# Altium PCB PCB2 4 warstwy.PcbDoc
Units mil, origin at the board's own origin, x right, y up, seen from the top; angles counter-clockwise.
Board outline 6000 x 4000 mil, 4 copper layers (Top Layer, +5VDC, GND, Bottom Layer), stack 23.756 mil thick; 111 components, 87 nets, 302 pads, 10 vias.
Unrouted connection lines stored in the file: 202.
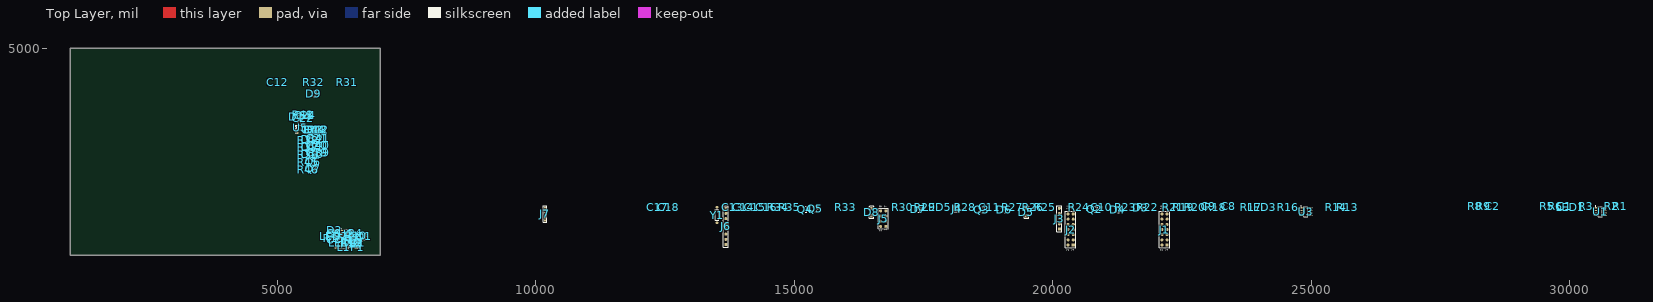
[diagram p0: Top Layer view]
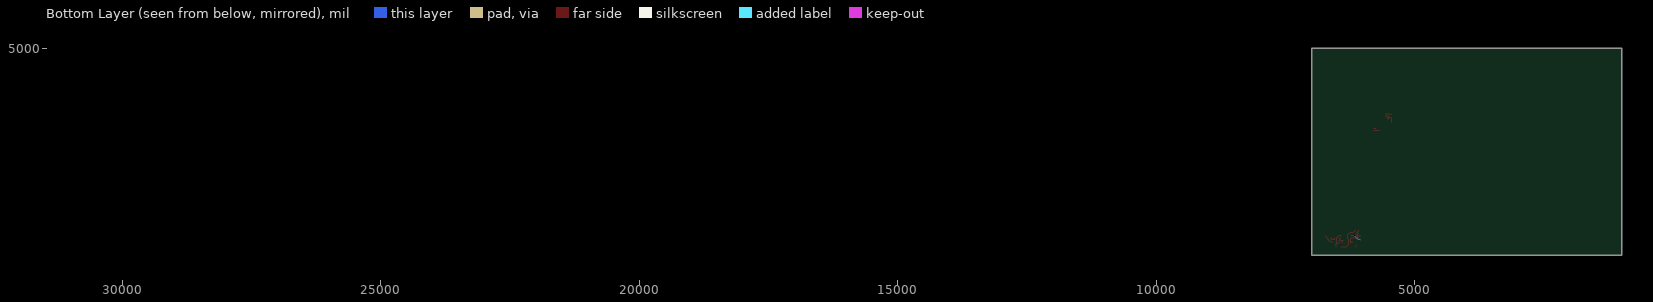
[diagram p1: Bottom Layer view, seen from below]
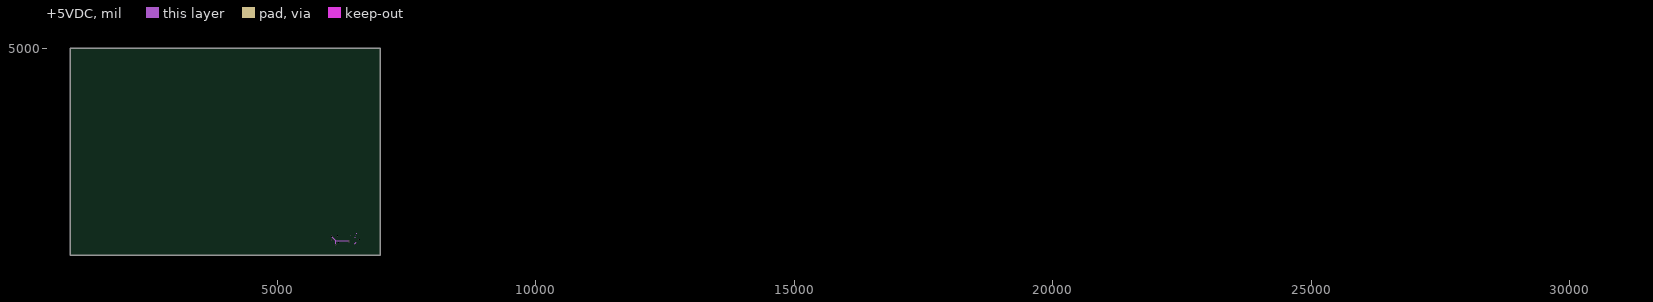
[diagram p2: +5VDC]
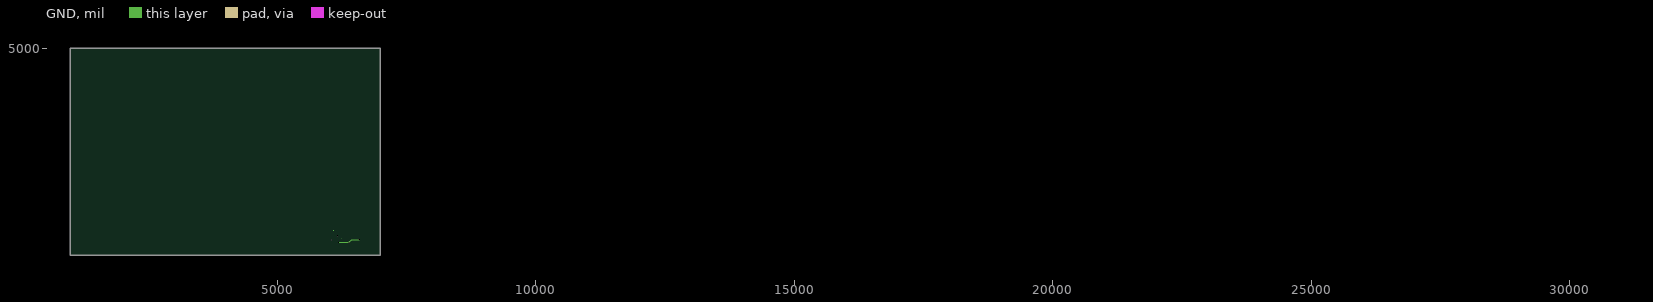
[diagram p3: GND]

## Layer stack, top to bottom
Top Solder: solder mask 0.4, Solder Resist, Dk 3.5
Top Layer: signal copper 1.4
Dielectric 2: prepreg 2.8, PP-006, Dk 4.1
+5VDC: signal copper 1.3779
Dielectric 1: dielectric 12.6, FR-4, Dk 4.8
GND: signal copper 1.3779
Dielectric 3: prepreg 2.8, PP-006, Dk 4.1
Bottom Layer: signal copper 1.4
Bottom Solder: solder mask 0.4, Solder Resist, Dk 3.5

## Board outline
1000,1000 7000,1000 7000,5000 1000,5000

## Design rules (kind name [scope] priority, off if disabled: settings)
Clearance [All] p1: gap=6 ignorepadtopadclearanceinfootprint=FALSE
PolygonConnect [All] p1: connectstyle=Relief reliefconductorwidth=10 reliefentries=4 polygonreliefangle="90 Angle" airgapwidth=10
RoutingVias [All] p1: holewidth=16 width=20 viastyle="Through Hole" minholewidth=8 minwidth=18 maxholewidth=39 maxwidth=50
SolderMaskExpansion [All] p1: expansion=4
Width [All] p1: maxlimit=10 minlimit=10 preferedwidth=10
30 further rules are at their usual default settings.

## Components (designator, comment, footprint, x,y, rotation, side; value= is the part's Value field where it differs from the comment)
C1 "100n" 0603 29905,1945 r0 top
C2 "4n7" 0603 28515,1945 r0 top value=100n
C3 "100n" 0402-A 6535,1300 r0 top
C4 "10u/16" 0402-A 6535,1340 r0 top value=470u/16
C5 "100u/6V3" 0603 6105,1395 r0 top value=470u/16
C6 "100n" 0603 6105,1425 r0 top
C7 "100p" 0603 6105,1295 r180 top value=100pF
C8 "100n" 0603 23410,1945 r0 top
C9 "4n7" 0603 23020,1945 r0 top value=100n
C10 "100n" 0603 20955,1930 r90 top
C11 "100n" 0603 18785,1930 r90 top
C12 "100n" 0603 5010,4340 r90 top
C13 "100n" 0603 13810,1930 r90 top
C14 "100n" 0603 14030,1930 r90 top
C15 "100n" 0603 14250,1930 r90 top
C16 "100n" 0603 14470,1930 r90 top
C17 "27p" 0603 12360,1930 r90 top value=100n
C18 "27p" 0603 12580,1930 r90 top value=100n
C19 "100n" 0402 5780,2975 r270 top
C20 "100n" 0402 5780,3120 r270 top
C21 "100n" 0402 5780,3265 r270 top
C22 "100n" 0603 5505,3645 r270 top
C23 "100n" 0402 5690,3425 r270 top
C24 "10n" 0402 5540,3705 r90 top value=100pF
D1 "P6SMB15A" 6-0805_N 6560,1240 r180 top
D2 "LL5817" 6-0805_L 6120,1480 r0 top
D3 "LL4148" 6-0805_N 21710,1920 r0 top
D4 "BAT54S" SOT23_M 21260,1875 r0 top
D5 "LL4148" 3.2X1.6X1.1 19495,1830 r90 top
D6 "BAT54S" SOT-23B_M 19070,1875 r0 top
D7 "BAT54S" SOT23_N 17400,1885 r0 top
D8 "LL4148" 3.2X1.6X1.1 16500,1830 r90 top
D9 "BAT54S" SOT23_M 5710,4120 r0 top
D10 "BAT54S" SOT23_L 5692.68,2955 r0 top
D11 "BAT54S" SOT23_L 5690,3100 r0 top
D12 "BAT54S" SOT23_L 5690,3245 r0 top
D13 "LL4148" 0402 5760,3425 r90 top
D14 "LL4448" 6-0805_N 5450,3680 r270 top
F1 "Fuse 1" 6-0805_N 6560,1150 r180 top
J1 "Header 7X2" HDR2X7 22215,1195 r90 top
J2 "Header 7X2" HDR2X7 20400,1195 r90 top
J3 "ZL201" HDR1X5 20130,1505 r90 top
J4 "MX-43045-0400" MHDR2X2 18120,1870 r0 top
J5 "MX-43045-0800" HDR2X4 16775,1555 r90 top
J6 "MX-43045-0600" HDR1X8 13680,1205 r90 top
J7 "MX-43045-0600" MHDR1X6 10180,1670 r90 top
L1 "DL22-330" AXIAL-0.3 6285,1150 r180 top value=100uH
LED1 "HCL-1904AYL" 0603 30025,1930 r90 top
LED2 "HCL-1903BG4" 0603 6105,1365 r0 top
LED3 "HCL-1906BR1" 0603 24060,1930 r90 top
LED4 "HCL-1904AYL" 6-0805_N 6275,1240 r180 top
LED5 "HCL-1906BR1" 0603 17770,1930 r90 top
Q1 "BSS138" SOT23_N 6690,1360 r0 top
Q2 "BSS123" SOT23_N 20815,1885 r0 top
Q3 "BSS123" SOT23_M 18630,1875 r0 top
Q4 "BSS123" SOT23_N 15220,1885 r0 top
Q5 "BSS123" SOT23_L 15410,1895 r0 top
Q6 "BSS123" SOT23_L 5695,2810 r0 top
Q7 "BSS123" SOT23_L 5695,2670 r0 top
R1 "CAN0001" 0603 30985,1945 r0 top
R2 "CAN0001" 0603 30815,1945 r0 top
R3 "nc" 0603 30325,1945 r0 top value=1K
R4 "1R" 0603 6525,1425 r0 top value=1K
R5 "4k7" 0603 29565,1945 r0 top value=1K
R6 "1k" 0603 29735,1945 r0 top value=1K
R7 "3k6 1%" 0603 6445,1275 r0 top value=1K
R8 "68" 0603 28175,1945 r0 top value=1K
R9 "68" 0603 28345,1945 r0 top value=1K
R10 "1M" 0603 6530,1375 r0 top value=1K
R11 "1k2 1%" 0603 6445,1245 r0 top value=1K
R12 "4k7" 0603 6445,1215 r180 top value=1K
R13 "CAN0001" 0603 25710,1930 r90 top
R14 "CAN0001" 0603 25490,1930 r90 top
R15 "1k8" 0603 6103.78,1325 r0 top value=1K
R16 "nc" 0603 24560,1930 r90 top value=1K
R17 "4k7" 0603 23840,1930 r90 top value=1K
R18 "1k" 0603 23160,1930 r90 top value=1K
R19 "68" 0603 22540,1930 r90 top value=1K
R20 "68" 0603 22760,1930 r90 top value=1K
R21 "10k" 0603 22330,1930 r90 top value=1K
R22 "10k" 0603 21840,1930 r90 top value=1K
R23 "1k" 0603 21420,1930 r90 top value=1K
R24 "4k7" 0603 20520,1930 r90 top value=1K
R25 "10k" 0603 19860,1930 r90 top value=1K
R26 "10k" 0603 19630,1930 r90 top value=1K
R27 "1k" 0603 19230,1930 r90 top value=1K
R28 "4k7" 0603 18315,1930 r90 top value=1K
R29 "10k" 0603 17540,1930 r90 top value=1K
R30 "1k8" 0603 17100,1930 r90 top value=1K
R31 "10k" 0603 6360,4340 r90 top value=1K
R32 "1k" 0603 5705,4340 r90 top value=1K
R33 "nc" 0603 16000,1930 r90 top value=1K
R34 "4k7" 0603 14690,1930 r90 top value=1K
R35 "4k7" 0603 14920,1930 r90 top value=1K
R36 "10k" 0402 5605,2940 r90 top value=1K
R37 "10k" 0402 5600,3085 r90 top value=1K
R38 "10k" 0402 5605,3225 r90 top value=1K
R39 "470" 0402 5820,2975 r90 top value=1K
R40 "1k" 0402 5820,3120 r90 top value=1K
R41 "1k" 0402 5820,3265 r90 top value=1K
R42 "4k7" 0402 5795,3425 r270 top value=1K
R43 "10k" 0603 5505,3713.78 r270 top value=1K
R44 "4k7" 0402 5725,3425 r270 top value=1K
R45 "4k7" 0402 5605,2795 r270 top value=1K
R46 "4k7" 0402 5605,2655 r270 top value=1K
S1 "DTSM32NB" 0402 5575,3705 r90 top
U1 "MCP2551-I/SN" SO8_L 30590,1840 r0 top
U2 "MC33063AD" SO8_N 6335,1400 r0 top
U3 "MCP2551-I/SN" SO8_L 24900,1840 r0 top
U5 "MCP1320-46LT" SOP5(6) 5450,3465 r0 top
Y1 "10MHz" AXIAL-0.3 13510,1775 r90 top

## Footprints (in the part's own frame and the unit in brackets; to place one, negate y for a bottom-side part, rotate by r counter-clockwise, add the part's x,y. Pads: shape width x height; smd on the part's side, far side on the other; paste and mask are expansions set on the pad)
3.2X1.6X1.1 [mm] "SMT LED; 2 Flat Leads"
  rect 1.5x1.5 smd: 1(-1.75,0) 2(1.75,0)
  silkscreen extent -2.9,-1.15 3.2,1.15
6-0805_L [mm] "Chip Resistor, Body 2.0x1.2mm, IPC High Density"
  rect 1x1.3 smd: 1(-0.8,0) 2(0.8,0)
  silkscreen extent 0,-0.55 0,0.55, body extent -1.07,-0.7 1.07,0.7, height 0.7
6-0805_N [mm] "Chip Resistor, Body 2.0x1.2mm, IPC Medium Density"
  rect 1.2x1.4 smd: 1(-0.9,0) 2(0.9,0)
  silkscreen extent 0,-0.6 0,0.6, body extent -1.07,-0.7 1.07,0.7, height 0.7
0402 [mm] "Chip Capacitor, Body 1.0x0.5mm, IPC High Density"
  rect 0.6x0.5 smd: 1(-0.5,0) 2(0.5,0)
  body extent -0.55,-0.3 0.55,0.3, height 1.3
0402-A [mm] "Chip Inductor, Body 1.0x0.5mm, IPC High Density"
  rect 0.6x0.5 smd: 1(-0.5,0) 2(0.5,0)
  silkscreen extent -1.1,-0.15 -1.1,0.15, body extent -0.55,-0.3 0.55,0.3, height 0.55
0603 [mm] "Chip Inductor, Body 0.6x0.3mm, IPC High Density"
  rect 0.5x0.3 smd: 1(-0.35,0) 2(0.35,0)
  silkscreen extent -0.9,-0.05 -0.9,0.05, body extent -0.33,-0.18 0.33,0.18, height 0.55
AXIAL-0.3 [mm] "Axial Device, Thru-Hole; 2 Leads; 0.3 in Pin Spacing"
  round 1.4 smd: 1(-3.81,0) 2(3.81,0)
  silkscreen extent -2.77,-0.76 2.77,0.76
HDR1X5 [mm] "Connector; Header; 5 Position"
  rect 1.5x1.5 smd: 1(0,0)
  round 1.5 smd: 2(2.54,0) 3(5.08,0) 4(7.62,0) 5(10.16,0)
  silkscreen extent -1.27,-1.27 11.43,1.27
HDR1X8 [mm] "Connector; Header; 8 Position"
  rect 1.5x1.5 smd: 1(0,0)
  round 1.5 smd: 2(2.54,0) 3(5.08,0) 4(7.62,0) 5(10.16,0) 6(12.7,0) 7(15.24,0) 8(17.78,0)
  silkscreen extent -1.27,-1.27 19.05,1.27
HDR2X4 [mm] "Connector; Header; 4x2 Position"
  rect 1.5x1.5 smd: 1(0,0)
  round 1.5 smd: 2(0,2.54) 3(2.54,0) 4(2.54,2.54) 5(5.08,0) 6(5.08,2.54) 7(7.62,0) 8(7.62,2.54)
  silkscreen extent -1.27,-1.27 8.89,3.81
HDR2X7 [mm] "Connector; Header; 7x2 Position"
  rect 1.5x1.5 smd: 1(0,0)
  round 1.5 smd: 2(0,2.54) 3(2.54,0) 4(2.54,2.54) 5(5.08,0) 6(5.08,2.54) 7(7.62,0) 8(7.62,2.54) 9(10.16,0) 10(10.16,2.54) 11(12.7,0) 12(12.7,2.54) 13(15.24,0) 14(15.24,2.54)
  silkscreen extent -1.27,-1.27 16.51,3.81
MHDR1X6 [mm] "Connector; Header; 6 Position"
  rect 1x1 smd: 1(0,0)
  round 1 smd: 2(1.27,0) 3(2.54,0) 4(3.81,0) 5(5.08,0) 6(6.35,0)
  silkscreen extent -0.9,-0.9 7.25,0.9
MHDR2X2 [mm] "Connector; Header; 2x2 Position"
  rect 1x1 smd: 1(0,0)
  round 1 smd: 2(0,1.27) 3(1.27,0) 4(1.27,1.27)
  silkscreen extent -0.9,-0.9 2.17,2.17
SO8_L [mm] "SOIC, 8-Leads, Body 4.9x3.9mm, Pitch 1.27mm, IPC High Density"
  oval 1.9x0.6 smd: 1(-2.35,1.905) 2(-2.35,0.635) 3(-2.35,-0.635) 4(-2.35,-1.905) 5(2.35,-1.905) 6(2.35,-0.635) 7(2.35,0.635) 8(2.35,1.905)
  silkscreen extent -2.47,-2.5 1,2.88, body extent -2,-2.5 2,2.5, height 1.75
SO8_N [mm] "SOIC, 8-Leads, Body 4.9x3.9mm, Pitch 1.27mm, IPC Medium Density"
  oval 2.2x0.6 smd: 1(-2.4,1.905) 2(-2.4,0.635) 3(-2.4,-0.635) 4(-2.4,-1.905) 5(2.4,-1.905) 6(2.4,-0.635) 7(2.4,0.635) 8(2.4,1.905)
  silkscreen extent -2.52,-2.5 0.9,2.88, body extent -2,-2.5 2,2.5, height 1.75
SOP5(6) [mm] "Small Outline; 6 Leads (1 Absent); Body Width 4.4 mm; Pitch 1.27 mm"
  rect 0.6x1.2 smd: 1(-1.27,-2.6) 3(1.27,-2.6) 4(1.27,2.6) 5(0,2.6) 6(-1.27,2.6)
  silkscreen extent -2.24,-2.72 2.15,1.1
SOT23_L [mm] "SOT23, 3-Leads, Body 2.9x1.3mm, Pitch 0.95mm, Lead Span 2.3mm - Reverse Pinning, IPC High Density"
  rect 0.85x0.6 smd: 1(1.075,0) 2(-1.075,-0.95) 3(-1.075,0.95)
  silkscreen extent -0.3,-1.5 1.48,1.5, body extent -0.7,-1.5 0.7,1.5, height 1.1
SOT23_M [mm] "SOT23, 3-Leads, Body 2.9x1.3mm, Pitch 0.95mm, Lead Span 2.3mm - Reverse Pinning, IPC Low Density"
  rect 1.45x0.6 smd: 1(1.175,0) 2(-1.175,-0.95) 3(-1.175,0.95)
  silkscreen extent -0.1,-1.5 1.48,1.5, body extent -0.7,-1.5 0.7,1.5, height 1.1
SOT23_N [mm] "SOT23, 3-Leads, Body 2.9x1.3mm, Pitch 0.95mm, Lead Span 2.3mm - Reverse Pinning, IPC Medium Density"
  rect 1.15x0.6 smd: 1(1.125,0) 2(-1.125,-0.95) 3(-1.125,0.95)
  silkscreen extent -0.2,-1.5 1.48,1.5, body extent -0.7,-1.5 0.7,1.5, height 1.1
SOT-23B_M [mm] "SOT23, 3-Leads, Body 2.9x1.3mm, Pitch 0.95mm, Lead Span 2.4mm, IPC Low Density"
  rect 1.45x0.6 smd: 1(-1.175,0.95) 2(-1.175,-0.95) 3(1.175,0)
  silkscreen extent -1.3,-1.5 0.7,1.92, body extent -0.7,-1.5 0.7,1.5, height 1.14

## Part data
C1 C2 C3 C6 C7 C8 C9 C10 C11 C12 C13 C14 C15 C16 C17 C18 C19 C20 C21 C22 C23 C24: library part Cap, "Capacitor", LatestRevisionDate=17-Jul-2002, LatestRevisionNote="Re-released for DXP Platform.", PackageReference=RAD-0.3, Published=8-Jun-2000, Publisher="Altium Limited"
C4 C5: library part "Cap Pol1", "Polarized Capacitor (Radial)", LatestRevisionDate=17-Jul-2002, LatestRevisionNote="Re-released for DXP Platform.", PackageReference=RB7.6-15, Published=8-Jun-2000, Publisher="Altium Limited"
D1: library part "D Zener", "Zener Diode", LatestRevisionDate=17-Jul-2002, LatestRevisionNote="Re-released for DXP Platform.", PackageReference=DIODE-0.7, Published=8-Jun-2000, Publisher="Altium Limited"
D2 D3 D5 D8 D13: library part 1N4148, "High Conductance Fast Diode", Code_JEDEC=DO-204-AH, ComponentLink1Description="Manufacturer Link", ComponentLink1URL=http://www.fairchildsemi.com/, ComponentLink2Description=Datasheet, ComponentLink2URL=http://www.fairchildsemi.com/ds/1N%2F1N4148.pdf, DatasheetDocument=1997, LatestRevisionDate=17-Jul-2002, LatestRevisionNote="Re-released for DXP Platform.", PackageReference=DO-35, Published=8-Jun-2000, Publisher="Altium Limited"
D4 D6 D7 D9 D10 D11 D12: "Schottky Barrier Double Diode", ComponentLink1Description="Manufacturer Link", ComponentLink1URL=http://www.semiconductors.philips.com/, ComponentLink2Description=Datasheet, ComponentLink2URL=http://www.semiconductors.philips.com/acrobat/datasheets/BAT54_SERIES_4.pdf, DatasheetVersion=4-Mar-2002, LatestRevisionDate=12-Dec-2006, LatestRevisionNote="IPC-7351 Footprint Added.", PackageDescription="3-Pin SOT-23 Package 0.95 mm Pitch, 2.3 mm Lead Span", PackageReference=SOT23, PackageVersion=May-1999, Published=17-Sep-2003, Publisher="Altium Limited"
D14: library part Diode, "Default Diode", PackageDocument=Sep-1996, Code_JEDEC=DO-214-AB, LatestRevisionDate=17-Jul-2002, LatestRevisionNote="Re-released for DXP Platform.", PackageReference=SMC, Published=8-Jun-2000, Publisher="Altium Limited"
F1: "Fuse", LatestRevisionDate=17-Jul-2002, LatestRevisionNote="Re-released for DXP Platform.", PackageReference=PIN-W2/E2.8, Published=8-Jun-2000, Publisher="Altium Limited"
J1 J2: "Header, 7-Pin, Dual row", LatestRevisionDate=17-Jul-2002, LatestRevisionNote="Re-released for DXP Platform.", Publisher="Altium Limited"
J3: library part CON5, "Connector"
J4: library part "Header 2X2", "Header, 2-Pin, Dual row", LatestRevisionDate=17-Jul-2002, LatestRevisionNote="Re-released for DXP Platform.", Publisher="Altium Limited"
J5: library part "Header 4X2A", "Header, 4-Pin, Dual row", LatestRevisionDate=17-Jul-2002, LatestRevisionNote="Re-released for DXP Platform.", Publisher="Altium Limited"
J6 J7: library part "Header 6", "Header, 6-Pin", LatestRevisionDate=17-Jul-2002, LatestRevisionNote="Re-released for DXP Platform.", Publisher="Altium Limited"
L1: library part "Inductor Iron", "Magnetic-Core Inductor", Published=24-Mar-1999, Publisher="Altium Limited", Revision="July-2002: Re-released for DXP Platform."
LED1 LED2 LED3 LED4 LED5: library part LED3, "Typical BLUE SiC LED", Published=8-Jun-2000, Publisher="Altium Limited", Revision 1="Jul-2002: Re-released for DXP Platform.", Revision 2="17-Dec-2003: PCB Footprint replaced."
Q1: "N-Channel Enhancement Mode Vertical DMOS FET", ComponentLink1Description="Manufacturer Link", ComponentLink1URL=http://www.zetex.com/, ComponentLink2Description=Datasheet, ComponentLink2URL=www.zetex.com/3.0/pdf/BSS138.pdf, DatasheetVersion=Mar-96, PackageDescription="SOT-23; 3 Leads; Body 3.1 x 2.5 mm, inc. leads (LxW max), Alternate Lead Configuration", PackageReference=SOT23, PackageVersion=1996, Published=17-Dec-2003, Publisher="Altium Limited"
Q2 Q3 Q4 Q5 Q6 Q7: "N-channel Enhancement Mode Vertical D-MOSFET", ComponentLink1Description="Manufacturer Link", ComponentLink1URL=http://www.semiconductors.philips.com/, ComponentLink2Description=Datasheet, ComponentLink2URL=http://www.semiconductors.philips.com/acrobat/datasheets/BSS123_3.pdf, DatasheetVersion=Apr-1995, LatestRevisionDate=12-Dec-2006, LatestRevisionNote="IPC-7351 Footprint Added.", PackageDescription="3-Pin SOT-23 Package 0.95 mm Pitch, 2.3 mm Lead Span", PackageReference=SOT23, PackageVersion=May-1999, Published=17-Sep-2003, Publisher="Altium Limited"
R1 R2 R13 R14: library part "Res Varistor", "Varistor (Voltage-Sensitive Resistor)", LatestRevisionDate=04-Mar-2005, LatestRevisionNote="PCB Footprint replaced.", PackageReference=6-0805, Published=24-Mar-1999, Publisher="Altium Limited"
R3 R4 R5 R6 R7 R8 R9 R10 R11 R12 R15 R16 R17 R18 R19 R20 R21 R22 R23 R24 R25 R26 R27 R28 R29 R30 R31 R32 R33 R34 R35 R36 R37 R38 R39 R40 R41 R42 R43 R44 R45 R46: library part Res2, "Resistor", LatestRevisionDate=17-Jul-2002, LatestRevisionNote="Re-released for DXP Platform.", PackageReference=AXIAL-0.4, Published=8-Jun-2000, Publisher="Altium Limited"
S1: library part PUSHB, "Switch PushButton"
U1 U3: "High Speed CAN Transceiver, 8-Pin Plastic SOIC, Industrial Grade", Code_JEDEC=MS-012, ComponentLink1Description="Manufacturer Link", ComponentLink1URL=http://www.microchip.com, ComponentLink2Description=Datasheet, ComponentLink2URL=http://ww1.microchip.com/downloads/en/DeviceDoc/21667d.pdf, DatasheetVersion=Nov-2003, LatestRevisionDate=13-Apr-2006, LatestRevisionNote="IPC-7351 Footprint Added.", PackageDescription="8-Pin Plastic Narrow Body Small Outline Integrated Circuit 1.27 mm Pitch", PackageReference=SOIC150-8, PackageVersion=Oct-2005, Published=6-Oct-2005, Publisher="Altium Limited"
U2: "DC-to-DC Converter Control Circuit", Code_IPC=SOIC127P600-8, Code_JEDEC=MS-012-AA, ComponentLink1Description="Manufacturer Link", ComponentLink1URL=http://www.onsemi.com/site/products/taxonomy/0,4438,503,00.html, ComponentLink2Description=Datasheet, ComponentLink2URL=http://www.onsemi.com/pub/Collateral/MC34063A-D.PDF, DatasheetVersion=1988, LatestRevisionDate=13-Apr-2006, LatestRevisionNote="IPC-7351 Footprint Added.", PackageDescription="8-Pin Small Outline Integrated Circuit 1.27 mm Pitch", PackageReference=751-02, Published=17-Jul-2002, Publisher="Altium Limited"
U5: library part MCP1320
Y1: library part XTAL, "Crystal Oscillator", LatestRevisionDate=17-Jul-2002, LatestRevisionNote="Re-released for DXP Platform.", PackageReference=R38, Published=8-Jun-2000, Publisher="Altium Limited"

## Via types
v1: diameter 20, hole 16, Top Layer to +5VDC, 5 vias
v2: diameter 20, hole 16, Top Layer to GND, 3 vias
v3: diameter 20, hole 16, +5VDC to Bottom Layer, 2 vias

## Nets (pads, with @x,y where several pads share a name; then routed paths per layer and width w, separated by ;. In a path a pad name is that pad's centre, name@x,y a point inside that pad or via, vN(x,y) a via of type N, cw(c..) or ccw(c..) an arc to the next point about the centre after c; other vN are vias at no path point)
+5V: C1.1 C5.1 C6.1 C8.1 C13.1 C14.1 C15.1 C16.1 C22.1 D4.2 D6.2 D7.2 D9.2 D10.2 D11.2 D12.2 D13.2 D14.2 J1.2 J2.2 J2.4 J2.6 J3.2 J4.2 L1.2 LED1.1 LED2.1 LED3.1 LED5.1 R7.1 R22.1 R26.1 R31.1 R36.1 R37.1 R38.1 R42.1 R43.2 U1.3 U3.3 U5.5 | length 864
  Top Layer w10: U5.5 D14.2 5464.21,3658.78 C22.1 R43.2 ; D13.2 R42.1 ; v1(6050,1365) LED2.1 C5.1 C6.1 ; L1.2 v1(6135,1200) ; v1(6390,1275) R7.1
  +5VDC w10: v1(6050,1365) 6135,1280 ; v1(6135,1200) 6135,1280 ; v1(6390,1275) 6140,1275 6135,1280
+12V: C3.1 C4.1 D1.2 F1.2 J5.5 R4.2 R10.1 R12.1 U2.6 | length 420.7
  Top Layer w10: U2.6 6460.98,1375 6491.14,1344.84 6510.47,1344.84 C4.1 C3.1 6515.31,1249.25 D1.2 D1.2@6524.57,1236.06 ; R12.1 6503.5,1215 D1.2@6524.57,1236.06 ; F1.2 D1.2@6524.57,1236.06
  +5VDC w10: 6503.5,1215 6524.57,1236.06 6524.57,1240 6515.31,1249.25 ; 6515.31,1340 6515.77,1340.45 ; 6515.31,1375 6515.77,1374.55 ; 6534.84,1425 6538.78,1425
+12VPWR: F1.1 J6.3 J7.3
ADC0: J1.4
ADC1: J1.6
ADC2: J1.8
ADC3: J1.10
ADC4: J1.12
ButD: C10.1 D4.3 R22.2 R23.2
ButD_IN: J5.2 R23.1
ButN: C11.1 D6.3 R26.2 R27.2
ButN_IN: J5.3 R27.1
ButR: C12.1 D9.3 R31.2 R32.2
ButR_IN: J5.4 R32.1
CAN_BMS_RX: 
CAN_BMS_TX: R17.2 U3.1
CAN_BMSS_H: J7.1 R13.2 R20.1 U3.7
CAN_BMSS_L: J7.2 R14.1 R19.1 U3.6
CAN_MUX_RX: 
CAN_MUX_TX: R5.2 U1.1
CAN_MUXED_H: J6.1 R1.2 R9.1 U1.7
CAN_MUXED_L: J6.2 R2.1 R8.1 U1.6
ChrgLED: Q6.3 R45.1
ChrgLED_OUT: J7.6 Q6.1
FluidHeater: Q7.3 R46.1
FluidHeater_OUT: J6.6 Q7.1
GND: C1.2 C2.1 C3.2 C4.2 C5.2 C6.2 C7.1 C8.2 C9.1 C10.2 C11.2 C12.2 C13.2 C14.2 C15.2 C16.2 C17.2 C18.2 C19.2 C20.2 C21.2 C22.2 C23.1 C24.1 D2.1 D4.1 D6.1 D7.1 D9.1 D10.1 D11.1 D12.1 J1.14 J2.12 J2.14 J3.3 J4.1 J5.1 LED4.2 Q1.2 Q2.2 Q3.2 Q4.2 Q5.2 Q6.2 Q7.2 R1.1 R2.2 R6.2 R11.1 R13.1 R14.2 R15.2 R18.2 R24.2 R28.2 R34.2 R35.2 R45.2 R46.2 S1.1 U1.2 U2.4 U3.2 | length 1184.2
  Top Layer w10: C22.2 5505,3635.16 5505.91,3636.06 5513.59,3636.06 5536.03,3658.5 5536.03,3681.34 C24.1 S1.1 ; D2.1 6088.5,1474.09 6116.69,1445.91 6116.69,1425.91 6117.6,1425 C6.2 C5.2 6122.72,1395 6139.62,1378.09 6139.62,1343.13 ; C7.1 6118.17,1295.61 6118.17,1324.39 R15.2 6121.5,1325 6139.62,1343.13 ; v2(6190,1245) 6234.57,1245 LED4.2 6239.57,1324.06 U2.4 6157.75,1325 6139.62,1343.13 ; v2(6390,1245) R11.1 ; C4.2 C3.2 v2(6590,1300) 6591.91,1301.91 6614.2,1301.91 6634.88,1322.6 Q1.2
  GND w10: 6088.5,1480 6091.22,1477.28 ; v2(6190,1245) v2(6390,1245) 6445,1300 v2(6590,1300) ; 6239.57,1324.06 6240.51,1325
GPIOC13: J2.3
GPIOC14: J2.1
GPIOD0: J2.5
GPIOD1: J1.13
GPIOD2: J1.11
GPIOD3: J1.9
GPIOD4: J1.7
GPIOD5: J1.5
GPIOD6: J1.3
GPIOD7: J1.1
GPIOD8: J2.13
GPIOD9: J2.11
GPIOD10: J2.9
GPIOD11: J2.7
GROUND: D1.1 J6.4 J7.4 Q1.1 | length 196.5
  Top Layer w10: D1.1 6595.43,1243.94 6614.06,1262.56 6635.67,1262.56 6716.65,1343.54 6716.65,1353.19 6723.46,1360 Q1.1
ILUM: D7.3 J4.4 Q4.3 R34.1
IMP: C19.1 D10.3 R36.2 R39.2
IMP_IN: J4.3 R39.1
IsFHerror: C21.1 D12.3 R38.2 R41.2
IsFHerror_IN: J6.5 R41.1
IsHeating: C20.1 D11.3 R37.2 R40.2
IsHeating_IN: J7.5 R40.1
LightD: Q2.3 R24.1
LightD_OUT: D3.1 J5.6 Q2.1
LightN: Q3.3 R28.1
LightN_OUT: D5.1 J5.7 Q3.1
LightR: Q5.3 R35.1
LightR_OUT: D8.1 J5.8 Q5.1
MCLR: J3.1 R44.1
NetC2_2: C2.2 R3.2 R8.2 R9.2
NetC7_2: C7.2 U2.3 | length 254.9
  Top Layer w10: v1(6055,1295) C7.2 ; v3(6170,1375) U2.3
  Bottom Layer w10: v1(6055,1295) 6090,1295 v3(6170,1375)
  other v1: 6170,1375
  other v3: 6055,1295
NetC9_2: C9.2 R16.2 R19.2 R20.2
NetC17_1: C17.1 Y1.2
NetC18_1: C18.1 Y1.1
NetC24_2: C24.2 D14.1 R43.1 S1.2 U5.3 | length 128.8
  Top Layer w10: D14.1 5459.25,3724.69 C24.2 S1.2
NetD2_2: D2.2 L1.1 U2.2 | length 560.7
  Top Layer w10: D2.2 6151.5,1474.09 6197.98,1427.61 U2.2@6237.91,1427.61 ; U2.2 6272.01,1425 6294.82,1402.19 6294.82,1312.7 6275.81,1293.69 6275.81,1207.88 6333.7,1150 L1.1
NetD3_2: D3.2 R21.2
NetD5_2: D5.2 R25.2
NetD8_2: D8.2 R29.2
NetLED1_2: LED1.2 R5.1
NetLED2_2: LED2.2 R15.1 | length 56.5
  Top Layer w10: R15.1 6093.94,1325 6094.84,1325.91 6094.84,1337.32 6113.94,1356.41 6113.94,1364.09 6114.84,1365 LED2.2
NetLED3_2: LED3.2 R17.1
NetLED4_1: LED4.1 R12.2
NetLED5_2: LED5.2 R30.1
NetQ1_3: Q1.3 R10.2
NetQ4_1: Q4.1 R21.1 R25.1 R29.1
NetR3_1: R3.1 U1.5
NetR4_1: R4.1 U2.1 U2.7 U2.8
NetR6_1: R6.1 U1.8
NetR7_2: R7.2 R11.2 U2.5 | length 105.1
  Top Layer w10: U2.5 6451.09,1325 6457.38,1318.71 6457.38,1275.91 6458.29,1275 R7.2 R11.2
NetR16_1: R16.1 U3.5
NetR18_1: R18.1 U3.8
NetR30_2: R30.2
NetR33_2: R33.2
PGC: J3.5
PGD: J3.4
RESET: C23.2 D13.1 R42.2 R44.2 U5.1 | length 105
  Top Layer w10: C23.2 R44.2 R42.2
RX: J2.10
TX: J2.8
WDI: R33.1 U5.4
pads on no net: J6.7 J6.8 U1.4 U3.4 U5.6

## Text inside footprints (layer, text, board x,y; h text height)
J1: Top Overlay "2" at 22135,1075 h50 r90; Top Overlay "1" at 22235,1075 h50 r90; Top Overlay "14" at 22135,1875 h50 r90; Top Overlay "13" at 22235,1875 h50 r90
J2: Top Overlay "2" at 20320,1075 h50 r90; Top Overlay "1" at 20420,1075 h50 r90; Top Overlay "14" at 20320,1875 h50 r90; Top Overlay "13" at 20420,1875 h50 r90
J4: Top Overlay "1" at 18057.01,1850 h39.37; Top Overlay "3" at 18218.43,1847.26 h39.37
J5: Top Overlay "2" at 16695,1455 h50 r90; Top Overlay "1" at 16795,1475 h50 r90; Top Overlay "7" at 16795,1915 h50 r90; Top Overlay "8" at 16695,1915 h50 r90